# Altium PCB PDU_Main.PcbDoc
Units mm, origin at the board's own origin, x right, y up, seen from the top; angles counter-clockwise.
Board outline 180 x 140 mm, 2 copper layers (Top Layer, Bottom Layer); 69 components, 38 nets, 192 pads, 0 vias.
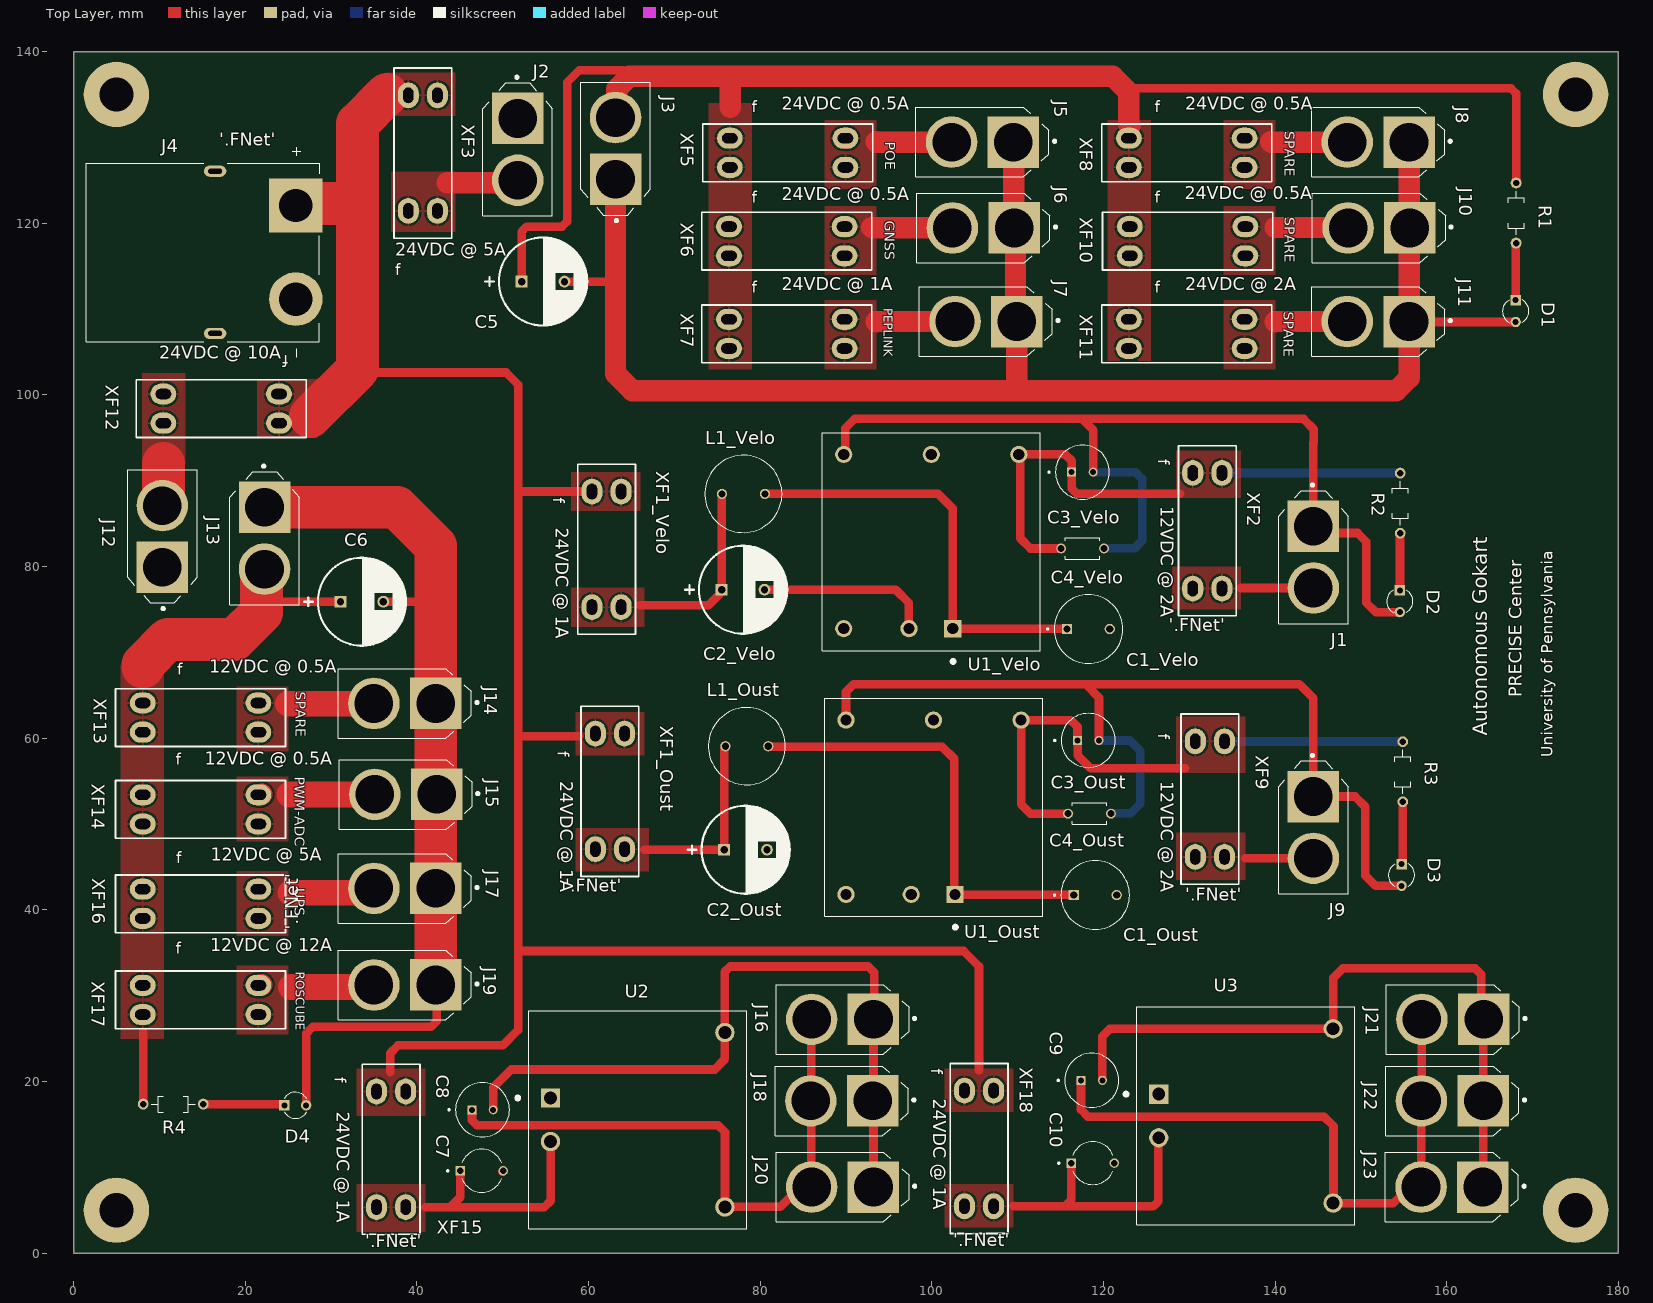
[diagram p0: Top Layer view]
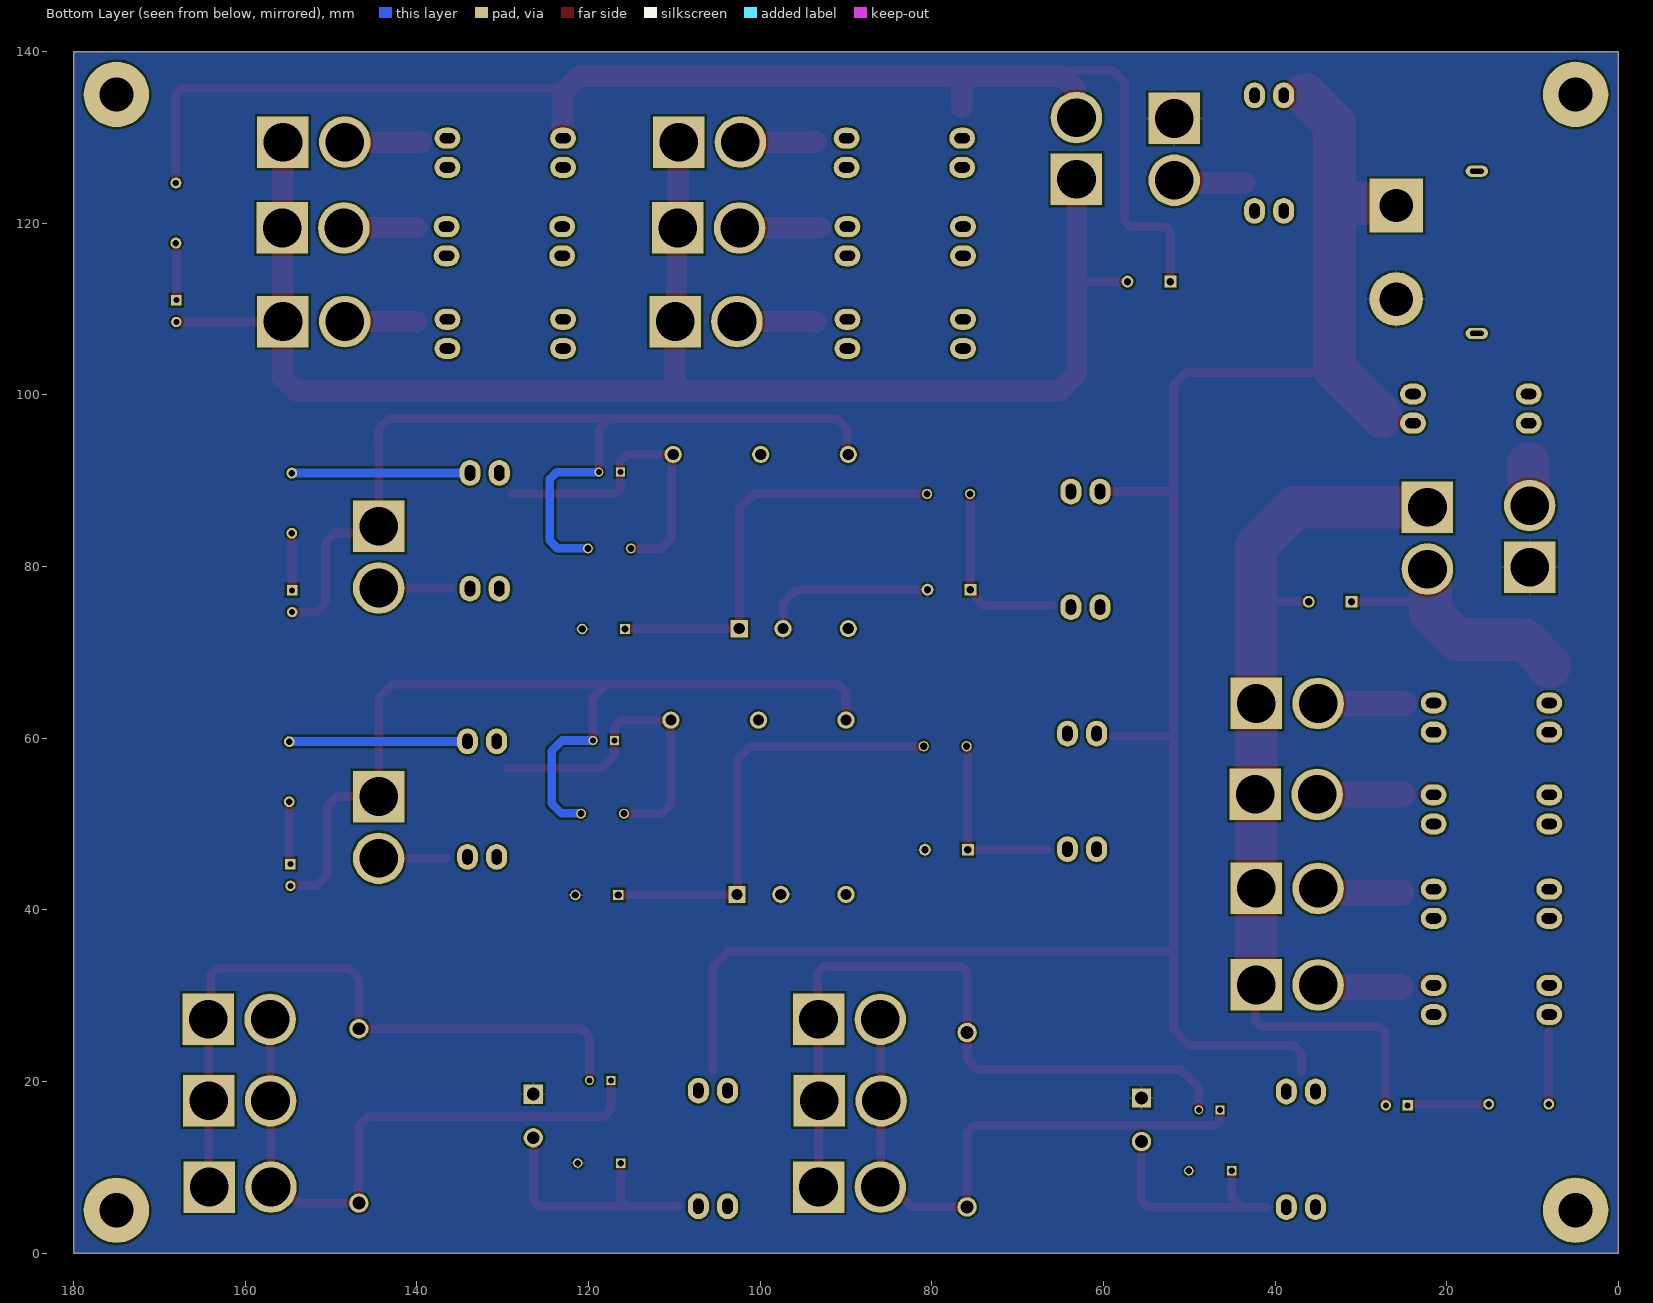
[diagram p1: Bottom Layer view, seen from below]

## Layer stack, top to bottom
Top Solder: solder mask 0.0102, Solder Resist, Dk 3.5
Top Layer: signal copper 0.0356
Dielectric 1: dielectric 0.32, FR-4, Dk 4.8
Bottom Layer: signal copper 0.0356
Bottom Solder: solder mask 0.0102, Solder Resist, Dk 3.5

## Board outline
0,0 0,140 180,140 180,0

## Design rules (kind name [scope] priority, off if disabled: settings)
AssemblyTestPointUsage [All] p1 off:
Clearance [All] p1: gap=0.254 ignorepadtopadclearanceinfootprint=FALSE except(0: Arc-Hole Track-Hole SMDPad-Hole THPad-Hole Via-Hole Fill-Hole Poly-Hole Region-Hole Text-Hole)
FabricationTestPointUsage [All] p1 off: valid=0 allowmultiple=FALSE
HoleSize [All] p1: absolutevalues=TRUE maxlimit=5 minlimit=0.025 maxpercent=80.000 minpercent=20.000
PolygonConnect [All] p1: connectstyle=Relief reliefconductorwidth=0.254 reliefentries=4 polygonreliefangle="90 Angle" airgapwidth=0.254
RoutingVias [All] p1: holewidth=0.711 width=1.27 viastyle="Through Hole" minholewidth=0.711 minwidth=1.27 maxholewidth=0.711 maxwidth=1.27
SilkToSolderMaskClearance [IsPad] p1: minsilkscreentomaskgap=0.051 clearancetoexposedcopper=TRUE
SolderMaskExpansion [All] p1: expansion=0.102 istentingtop=FALSE
Width [All] p1: maxlimit=5 minlimit=0.254 preferedwidth=1 minimp=50.000000 maximp=50.000000 favimp=50.000000
26 further rules are at their usual default settings.

## Classes and differential pairs
channel class "12V DCDC": "Ouster DCDC" Velodyne_DCDC
component class Velodyne_DCDC: C1_Velo C2_Velo C3_Velo C4_Velo L1_Velo U1_Velo XF1_Velo
component class PDU_Schematic: C5 C6 C7 C8 C9 C10 D1 D2 D3 D4 J1 J2 J3 J4 J5 J6 J7 J8 J9 J10 J11 J12 J13 J14 J15 J16 J17 J18 J19 J20 J21 J22 J23 R1 R2 R3 R4 U2 U3 XF2 XF3 XF5 XF6 XF7 XF8 XF9 XF10 XF11 XF12 XF13 XF14 XF15 XF16 XF17 XF18
component class "Ouster DCDC": C1_Oust C2_Oust C3_Oust C4_Oust L1_Oust U1_Oust XF1_Oust

## Components (designator, comment, footprint, x,y, rotation, side; value= is the part's Value field where it differs from the comment)
C1_Oust "ECE-A1HN330UB" Capacitor_33uF 118.8,41.8 r0 top (schematic designator C1)
C1_Velo "ECE-A1HN330UB" Capacitor_33uF 118,72.8 r0 top (schematic designator C1)
C2_Oust "ESC227M035AH1AA" NicCap_10x12.5 78.3,47 r0 top value=220uF (schematic designator C2)
C2_Velo "ESC227M035AH1AA" NicCap_10x12.5 78,77.3 r0 top value=220uF (schematic designator C2)
C3_Oust "Capacitor_10uF" Capacitor_10uF 118.2,59.8 r0 top (schematic designator C3)
C3_Velo "Capacitor_10uF" Capacitor_10uF 117.521,91.067 r0 top (schematic designator C3)
C4_Oust "Capacitor_1uF" Capacitor_1uF 118.3,51.3 r0 top (schematic designator C4)
C4_Velo "Capacitor_1uF" Capacitor_1uF 117.5,82.2 r0 top (schematic designator C4)
C5 "ESC227M035AH1AA" NicCap_10x12.5 54.7,113.2 r0 top value=220uF
C6 "ESC227M035AH1AA" NicCap_10x12.5 33.6,75.9 r0 top value=220uF
C7 "Capacitor_100uF" Capacitor_100uF 47.5,9.6 r0 top
C8 "Capacitor_10uF" Capacitor_10uF 47.621,16.767 r0 top
C9 "Capacitor_10uF" Capacitor_10uF 118.6,20.2 r0 top
C10 "Capacitor_100uF" Capacitor_100uF 118.7,10.5 r0 top
D1 "LED_Green_New" LED_Green_New 168,109.8 r270 top
D2 "LED_Green_New" LED_Green_New 154.5,76 r270 top
D3 "LED_Green_New" LED_Green_New 154.7,44.1 r270 top
D4 "LED_Green_New" LED_Green_New 25.8,17.2 r0 top
J1 "XT60 Connector" XT60_Connector 144.2,81.1 r270 top
J2 "XT60 Connector" XT60_Connector 51.5,128.6 r270 top
J3 "XT60 Connector" XT60_Connector 63.4,128.7 r90 top
J4 "XT90_Connector_Male" XT90_Connector_Male 16.5,117.5 r270 top
J5 "XT60 Connector" XT60_Connector 105.9,129.7 r180 top
J6 "XT60 Connector" XT60_Connector 106,119.7 r180 top
J7 "XT60 Connector" XT60_Connector 106.3,108.8 r180 top
J8 "XT60 Connector" XT60_Connector 152,129.7 r180 top
J9 "XT60 Connector" XT60_Connector 144.2,49.6 r270 top
J10 "XT60 Connector" XT60_Connector 152.1,119.7 r180 top
J11 "XT60 Connector" XT60_Connector 152,108.8 r180 top
J12 "XT60 Connector" XT60_Connector 10.6,83.5 r90 top
J13 "XT60 Connector" XT60_Connector 22,83.3 r270 top
J14 "XT60 Connector" XT60_Connector 38.6,64.3 r180 top
J15 "XT60 Connector" XT60_Connector 38.7,53.7 r180 top
J16 "XT60 Connector" XT60_Connector 89.6,27.5 r180 top
J17 "XT60 Connector" XT60_Connector 38.6,42.754 r180 top
J18 "XT60 Connector" XT60_Connector 89.5,18 r180 top
J19 "XT60 Connector" XT60_Connector 38.6,31.5 r180 top
J20 "XT60 Connector" XT60_Connector 89.6,7.954 r180 top
J21 "XT60 Connector" XT60_Connector 160.7,27.5 r180 top
J22 "XT60 Connector" XT60_Connector 160.65,18 r180 top
J23 "XT60 Connector" XT60_Connector 160.6,7.954 r180 top
L1_Oust "Inductor_1uH" Inductor_1uH 78.4,58.9 r0 top (schematic designator L1)
L1_Velo "Inductor_1uH" Inductor_1uH 78,88.3 r0 top (schematic designator L1)
R1 "Resistor_1k_TH" Resistor_1k_TH 168.1,121.2 r270 top
R2 "Resistor_1k_TH" Resistor_1k_TH 154.6,87.4 r270 top
R3 "Resistor_1k_TH" Resistor_1k_TH 154.9,56.1 r270 top
R4 "Resistor_1k_TH" Resistor_1k_TH 11.6,17.4 r0 top
U1_Oust "DC-DC_Converter_12V" DC-DC_Converter_12V 99.565,51.442 r180 top (schematic designator U1)
U1_Velo "DC-DC_Converter_12V" DC-DC_Converter_12V 99.3,82.4 r180 top (schematic designator U1)
U2 "DC-DC_Converter_5V" DC-DC_Converter_5V 65.9,15.3 r90 top
U3 "DC-DC_Converter_3.3V" DC-DC_Converter_3.3V 135.1,15.6 r90 top
XF1_Oust "3557-2" KSTN-3557-2 62.5,53.8 r270 top (schematic designator XF1)
XF1_Velo "3557-2" KSTN-3557-2 62.1,82 r270 top (schematic designator XF1)
XF2 "3557-2" KSTN-3557-2 132.1,84.165 r270 top
XF3 "3557-2" KSTN-3557-2 40.7,128.165 r270 top
XF5 "3557-2" KSTN-3557-2 83.2,128.2 r0 top
XF6 "3557-2" KSTN-3557-2 83.1,117.9 r0 top
XF7 "3557-2" KSTN-3557-2 83.1,107.1 r0 top
XF8 "3557-2" KSTN-3557-2 129.7,128.2 r0 top
XF9 "3557-2" KSTN-3557-2 132.4,52.9 r270 top
XF10 "3557-2" KSTN-3557-2 129.8,117.9 r0 top
XF11 "3557-2" KSTN-3557-2 129.7,107.1 r0 top
XF12 "3557-2" KSTN-3557-2 17.2,98.4 r180 top
XF13 "3557-2" KSTN-3557-2 14.8,62.4 r0 top
XF14 "3557-2" KSTN-3557-2 14.8,51.7 r0 top
XF15 "3557-2" KSTN-3557-2 37,12.1 r270 top
XF16 "3557-2" KSTN-3557-2 14.8,40.7 r0 top
XF17 "3557-2" KSTN-3557-2 14.8,29.5 r0 top
XF18 "3557-2" KSTN-3557-2 105.5,12.2 r270 top

## Footprints (in the part's own frame and the unit in brackets; to place one, negate y for a bottom-side part, rotate by r counter-clockwise, add the part's x,y. Pads: shape width x height; smd on the part's side, far side on the other; paste and mask are expansions set on the pad)
Capacitor_1uF [mm]
  round 1.15 hole 0.8: 1(-2.433,-0.097) 2(2.567,-0.097)
  silkscreen extent -1.93,-1.35 2.07,1.15
Capacitor_10uF [mm]
  round 1.05 hole 0.7: N(1.279,-0.067)
  rect 1.05x1.05 hole 0.7: P(-1.221,-0.067)
  silkscreen extent -3.97,-3.22 3.18,3.08, body extent -3.12,-3.22 3.18,3.08, height 5
Capacitor_33uF [mm]
  round 1.2 hole 0.85: N(2.741,-0.082)
  rect 1.2x1.2 / inner round 1.2 / far side rect 1.2x1.2 hole 0.85: P(-2.259,-0.082)
  silkscreen extent -4.61,-4.08 4.24,3.92, body extent -3.76,-4.08 4.24,3.92, height 11.5
Capacitor_100uF [mm]
  round 1.1 hole 0.75: N(2.56,-0.007)
  rect 1.1x1.1 hole 0.75: P(-2.44,-0.007)
  silkscreen extent -4,-2.51 2.38,2.49, body extent -2.69,-2.5 2.81,2.49, height 11
DC-DC_Converter_3.3V [mm]
  rect 2.25x2.25 hole 1.5: 1(2.926,8.66)
  round 2.25 hole 1.5: 2(-2.154,8.66) 3(-9.774,-11.66) 5(10.546,-11.66)
  silkscreen extent -12.31,-14.2 13.09,12.67
DC-DC_Converter_5V [mm]
  rect 2.25x2.25 hole 1.5: 1(2.783,10.334)
  round 2.25 hole 1.5: 2(-2.297,10.334) 3(-9.917,-9.986) 5(10.403,-9.986)
  silkscreen extent -12.46,-12.53 12.94,14.34
DC-DC_Converter_12V [mm]
  rect 2x2 hole 1.3: 1(-3.135,9.642)
  round 2 hole 1.3: 2(1.965,9.642) 3(-10.835,-10.658) 4(-0.635,-10.658) 5(9.565,-10.658) 6(9.565,9.642)
  silkscreen extent -13.34,-13.21 12.07,13.66
Inductor_1uH [mm]
  round 1.19 hole 0.84: 1(-2.453,0.161) 2(2.547,0.161)
  silkscreen extent -4.45,-4.34 4.55,4.66
KSTN-3557-2 [mm] "Fuse Holder, PCB Mount, Thru-Hole, Body 19.8x6.8mm, Height 7.4mm"
  oval 3x2.45 hole 1.2 slot 1.8 at 0 deg paste-1000: 1(-6.735,-1.7) 1(-6.735,1.7) 2(6.735,-1.7) 2(6.735,1.7)
  silkscreen extent -9.9,-3.36 9.9,3.36, body extent -9.88,-3.33 9.93,3.4, height 19.81
LED_Green_New [mm]
  rect 1.208x1.208 hole 0.7: A(-1.229,0.03)
  round 1.208 hole 0.7: C(1.311,0.03)
  silkscreen extent -1.25,-1.51 1.38,1.55
NicCap_10x12.5 [mil]
  rect 54x54 hole 34: 1(-98.42,0)
  round 54 hole 34: 2(98.43,0)
  silkscreen extent -266,-205 207,205, body extent -207,-207 207,207, height 532
Resistor_1k_TH [mm]
  round 1.258 hole 0.75: 1(-3.486,-0.03) 2(3.514,-0.03)
  silkscreen extent -2.54,-0.96 2.56,0.89
XT60_Connector [mm]
  rect 6x6 hole 4.5: 1(-3.6,0.254)
  round 6 hole 4.5: 2(3.6,0.254)
  silkscreen extent -8.55,-3.8 7.75,4.3
XT90_Connector_Male [mm]
  round 6.24 hole 3.9: N(6.339,9.4)
  rect 6.24x6.24 hole 3.9: P(-4.561,9.4)
  oval 1.3x2.6 hole 0.6 slot 1.6 at 90 deg: S1(-8.561,0) S2(10.339,0)
  silkscreen extent -11.36,-15 13.14,12.1, body extent -9.71,-15 11.49,12.1, height 10.3

## Part data
C1_Oust C1_Velo: library part Capacitor_33uF, "Cap Aluminum 33uF 50V 20% (8 X 11.5mm) Radial 5mm 110mA 2000 hr 85°C Ammo Pack", Capacitance=33uF, Case/Package=Radial, Manufacturer=Panasonic, Max Operating Temperature=85°C, Min Operating Temperature=-40°C, Package Quantity=1000, Ripple Current=110mA, Supplier Part Number 1=667-ECE-A1HN330UB, Tolerance=20%, Voltage Rating=50V, Category="Aluminum Electrolytic Capacitors", ComponentLink1Description=https://datasheet.ciiva.com/24043/aba0000ce97-24043933.pdf?src-supplier=Mouser, ComponentLink1URL=https://datasheet.ciiva.com/24043/aba0000ce97-24043933.pdf?src-supplier=Mouser, Construction=RADIAL, Diameter=8mm, Height=11.5mm, Height - Seated (Max)=0.492inch, Lead Diameter=0.6mm, Lead Pitch=5mm, Length=11.5mm, Life (Hours)=2000Hour, Manufacturer Part Number=ECE-A1HN330UB, Mount="Through Hole", Packaging="Ammo Pack", Pricing 1="1=0.89000, 10=0.62500, 50=0.47300, 100=0.41200, 500=0.30500, 1000=0.25900, 10000=0.25900 (USD)", Radiation Hardening=No, RoHS=Yes, Series=SU, Stock 1=2771, Supplier 1=Mouser, Termination=Radial, Voltage Rating (DC)=50V
C2_Oust C2_Velo C5 C6: library part CMP-3131333-1, "Aluminum Electrolytic Capacitor, Polarized, Aluminum (wet), 35V, 20% +Tol, 20% -Tol, 220uF, Through Hole Mount", Capacitor Type=Aluminium, Leakage Current=77uA, Manufacturer Series=ESC, Max Operating Temperature=105°C, Min Operating Temperature=-40°C, Package Shape=Cylindrical, Package Style=RadialMeter, Ripple Current=560mA, Tolerance=20%, Voltage=35V, Diameter=10mm, Dielectric Material=Aluminium, Length=12mm, Mount="Through Hole", Number of Pins=2, Packaging=Bulk, Polarity=Polarized, REACH SVHC=Yes, RoHS Compliant=Yes, Series=ESC, Tan Delta=0.1, Terminal Pitch=5mm, Termination=Wire
C3_Oust C3_Velo C8 C9: "Cap Aluminum 10uF 50V 20% (6.3 X 5mm) Radial 2.5mm 35mA 1000 hr 85°C Bulk", Capacitance=10uF, Case/Package=Radial, Leakage Current=3A, Manufacturer=Panasonic, Manufacturer Part Number=ECE-A1HKS100, Max Operating Temperature=85°C, Min Operating Temperature=-40°C, Package Quantity=200, Ripple Current=35mA, Tolerance=20%, Voltage=50V, Category="Aluminum Electrolytic Capacitors", ComponentLink1Description=https://datasheet.ciiva.com/11778/0900766b800274c4-11778985.pdf?src-supplier=RSComponents, ComponentLink1URL=https://datasheet.ciiva.com/11778/0900766b800274c4-11778985.pdf?src-supplier=RSComponents, ComponentLink2Description=https://datasheet.ciiva.com/2983/aba0000ce15-2983886.pdf?src-supplier=Avnet, ComponentLink2URL=https://datasheet.ciiva.com/2983/aba0000ce15-2983886.pdf?src-supplier=Avnet, ComponentLink3Description=https://datasheet.ciiva.com/43459/1339471-43459545.pdf?src-supplier=Farnell, ComponentLink3URL=https://datasheet.ciiva.com/43459/1339471-43459545.pdf?src-supplier=Farnell, ComponentLink4Description=https://datasheet.ciiva.com/24025/a-e-461514-24025641.pdf?src-supplier=Mouser, ComponentLink4URL=https://datasheet.ciiva.com/24025/a-e-461514-24025641.pdf?src-supplier=Mouser, ComponentLink5Description=https://datasheet.ciiva.com/16205/aba0000ce15-16205737.pdf?src-supplier=Future+Electronics, ComponentLink5URL=https://datasheet.ciiva.com/16205/aba0000ce15-16205737.pdf?src-supplier=Future+Electronics, ComponentLink6Description=https://datasheet.ciiva.com/46397/1339471-46397117.pdf?src-supplier=Element14, ComponentLink6URL=https://datasheet.ciiva.com/46397/1339471-46397117.pdf?src-supplier=Element14, ComponentLink7Description=https://datasheet.ciiva.com/15166/getdatasheetpartid-169217-15166123.pdf?src-supplier=Verical, ComponentLink7URL=https://datasheet.ciiva.com/15166/getdatasheetpartid-169217-15166123.pdf?src-supplier=Verical, ComponentLink8Description=https://datasheet.ciiva.com/14594/70067878-14594328.pdf?src-supplier=Allied+Electronics, ComponentLink8URL=https://datasheet.ciiva.com/14594/70067878-14594328.pdf?src-supplier=Allied+Electronics, Construction=RADIAL, Diameter=6.3mm, Height=5mm, Height - Seated (Max)=0.197inch, Lead Diameter=0.45mm, Lead Free="Lead Free", Lead Pitch=2.5mm, Length=5mm, Life (Hours)=1000Hour, Mount="Through Hole,PCB", Number of Pins=2, Packaging=Bulk, Polarity=Polar, Pricing 1="1=0.34520, 10=0.24180, 50=0.15970, 100=0.13540, 500=0.07970, 1000=0.07890, 2500=0.07540, 5000=0.07350 (USD)", Radiation Hardening=No, REACH SVHC="No SVHC", Ripple Current (AC)=35mA, RoHS=Yes, RoHS Compliant=Yes, Series=KS, Stock 1=3775, Supplier 1="Arrow Electronics", Supplier Part Number 1=ECE-A1HKS100, Termination=Radial, Voltage Rating=50V, Voltage Rating (DC)=50V, Weight=0.01lb, Width=0.5inch
C4_Oust C4_Velo: "Cap Ceramic 1uF 50V X5R 10% Radial 5mm 85C Ammo", Capacitance=1uF, Case/Package=Radial, Manufacturer=TDK, Manufacturer Part Number=FG28X5R1H105KRT06, Max Operating Temperature=85°C, Min Operating Temperature=-55°C, Tolerance=10%, Voltage Rating=50V, Category="Ceramic Capacitors", ComponentLink1Description=https://product.tdk.com/info/en/catalog/datasheets/leadmlcc_halogenfree_fg_en.pdf?src-supplier=Digi-Key, ComponentLink1URL=https://product.tdk.com/info/en/catalog/datasheets/leadmlcc_halogenfree_fg_en.pdf?src-supplier=Digi-Key, ComponentLink2Description=https://product.tdk.com/info/en/documents/chara_sheet/FG28X5R1H105KRT06.pdf?src-supplier=Digi-Key, ComponentLink2URL=https://product.tdk.com/info/en/documents/chara_sheet/FG28X5R1H105KRT06.pdf?src-supplier=Digi-Key, Height - Seated (Max)=0.217inch, Lead Pitch=0.197inch, Lead/Base Style=Kinked, Length=0.157inch, Mount="Through Hole", Packaging="Tape and Reel", Pricing 1="1=0.32620, 10=0.20190, 25=0.19940, 100=0.13080, 250=0.12850, 500=0.09320, 1000=0.09090, 3000=0.07620 (USD)", RoHS=Yes, RoHS Compliant=Yes, Stock 1=4381, Supplier 1="Arrow Electronics", Supplier Part Number 1=FG28X5R1H105KRT06, Width=0.098inch
C7 C10: "Cap Aluminum Lytic 100uF 16V 20% (5 X 11mm) Radial 5mm 180mA 2000h 85C Automotive Ammo", Capacitance=100uF, Case/Package=Radial, Leakage Current=3mA, Manufacturer=Panasonic, Manufacturer Part Number=ECA-1CM101B, Max Operating Temperature=85°C, Min Operating Temperature=-40°C, Package Quantity=2000, Ripple Current=180mA, Tolerance=20%, Voltage=16V, Category="Aluminum Electrolytic Capacitors", ComponentLink1Description=https://datasheet.ciiva.com/7803/aba0000ce12-7803672.pdf?src-supplier=Element14, ComponentLink1URL=https://datasheet.ciiva.com/7803/aba0000ce12-7803672.pdf?src-supplier=Element14, ComponentLink2Description=https://datasheet.ciiva.com/14608/70067785-14608475.pdf?src-supplier=Allied+Electronics, ComponentLink2URL=https://datasheet.ciiva.com/14608/70067785-14608475.pdf?src-supplier=Allied+Electronics, Construction=RADIAL, Diameter=5mm, Dissipation Factor=0.2%, Height=11mm, Height - Seated (Max)=0.472inch, Lead Diameter=0.5mm, Lead Free="Lead Free", Lead Pitch=5mm, Lead/Base Style=Straight, Length=11mm, Life (Hours)=2000Hour, Mount="Through Hole,PCB", Packaging="Ammo Pack", Pricing 1="1=0.28870, 10=0.18780, 25=0.18590, 100=0.09900, 250=0.09800, 500=0.05120, 1000=0.04920, 3000=0.04870 (USD)", Radiation Hardening=No, REACH SVHC=Unknown, RoHS=Yes, RoHS Compliant=Yes, Series=M, Stock 1=3761, Supplier 1="Arrow Electronics", Supplier Part Number 1=ECA-1CM101B, Termination=Radial, Voltage Rating=16V, Voltage Rating (DC)=16V, Width=0inch
D1 D2 D3 D4: "White high-intensity LED lamp, Color White, Vf 3.2 V, Radial-2, RoHS", Case/Package=Radial, Color=White, Forward Current=20mA, Forward Voltage=3.2V, Lens Color=Colorless, Manufacturer="TT Optek", Manufacturer Part Number=OVLAW4CB7, Max Operating Temperature=100°C, Min Operating Temperature=-40°C, Package Quantity=500, Category=LEDs, ComponentLink1Description=https://datasheet.ciiva.com/2113/ovlaw4cb7-2113528.pdf?src-supplier=Digi-Key, ComponentLink1URL=https://datasheet.ciiva.com/2113/ovlaw4cb7-2113528.pdf?src-supplier=Digi-Key, ComponentLink2Description=https://datasheet.ciiva.com/13500/ovlaw4cb7-20369-13500840.pdf?src-supplier=Mouser, ComponentLink2URL=https://datasheet.ciiva.com/13500/ovlaw4cb7-20369-13500840.pdf?src-supplier=Mouser, Height=5.2mm, Illumination Color=White, Lead Free="Lead Free", Lead Length=26.6mm, Lens Style=Dome,Clear,Round, Lens Transparency=Clear, Luminous Intensity=6200mcd, Mount="Through Hole", Number of Pins=1, Packaging=Bulk, Pricing 1="1=0.42860 (USD)", REACH SVHC="No SVHC", RoHS=Yes, RoHS Compliant=Yes, Series=-, Stock 1=9, Supplier 1="Arrow Electronics", Supplier Part Number 1=OVLAW4CB7, Test Current=20mA, Viewing Angle=45°
J1 J2 J3 J5 J6 J7 J8 J9 J10 J11 J12 J13 J14 J15 J16 J17 J18 J19 J20 J21 J22 J23: "DC power connectors AMASS - XT60"
J4: "DC power connectors AMASS - XT90"
L1_Oust L1_Velo: "Inductor Power Drum Core 1uH 20% 7.96MHz 20Q-Factor Ferrite 3.5A 0.013Ohm DCR RDL Automotive Box", Case/Package=Radial, Current Rating=3.5A, DC Resistance (DCR)=13mR, Inductance=1uH, Manufacturer=Abracon, Manufacturer Part Number=AIUR-03-1R0M, Max Operating Temperature=85°C, Min Operating Temperature=-40°C, Package Quantity=1000, Resistor Type=Wirewound, Saturation Current=10A, Self Resonant Frequency=150MHz, Supplier Part Number 1=AIUR-03-1R0M-ND, Test Frequency=7.96MHz, Tolerance=20%, Category="Fixed Inductors", ComponentLink1Description=https://datasheet.ciiva.com/6705/aiur-03-6705766.pdf?src-supplier=Digi-Key, ComponentLink1URL=https://datasheet.ciiva.com/6705/aiur-03-6705766.pdf?src-supplier=Digi-Key, Core Material=Ferrite, Height=0.472inch, Height - Seated (Max)=0.472inch, Mount="Through Hole", Packaging=Bulk, Pricing 1="1=0.55000, 10=0.47800, 25=0.44360, 50=0.37540, 100=0.34120, 250=0.32076, 500=0.28664, 1000=0.23205, 2500=0.21840 (USD)", RoHS=Yes, RoHS Compliant=Yes, Series=AIUR-03, Shielding=Unshielded, Stock 1=764, Supplier 1=Digi-Key
R1 R2 R3 R4: "Carbon Film Resistors - Through Hole 1K Ohm 5% 1/4W Res Carbon Film", Case/Package=Conformal, Manufacturer="TE Connectivity", Manufacturer Part Number=2-1623927-3, Max Operating Temperature=155°C, Max Power Dissipation=250mW, Min Operating Temperature=-55°C, Package Quantity=1, Resistance=1kR, Resistor Type="Carbon Film", Supplier Part Number 1=CFR16J1K0, Temperature Coefficient=-450ppm/°C, Tolerance=5%, Category="Through-Hole Resistors", ComponentLink1Description=https://datasheet.ciiva.com/5477/ng-ds-1773195-c-207356-5477538.pdf?src-supplier=Mouser, ComponentLink1URL=https://datasheet.ciiva.com/5477/ng-ds-1773195-c-207356-5477538.pdf?src-supplier=Mouser, ComponentLink2Description=https://datasheet.ciiva.com/6533/eng-cd-1623927-ba-6533055.pdf?src-supplier=Digi-Key, ComponentLink2URL=https://datasheet.ciiva.com/6533/eng-cd-1623927-ba-6533055.pdf?src-supplier=Digi-Key, ComponentLink3Description=https://datasheet.ciiva.com/30240/eng-ds-1773195-e-30240795.pdf?src-supplier=Onlinecomponents.com, ComponentLink3URL=https://datasheet.ciiva.com/30240/eng-ds-1773195-e-30240795.pdf?src-supplier=Onlinecomponents.com, Construction=Cylindrical, Diameter=1.85mm, Length=3.5mm, Military Standard=Not, Mount="Through Hole", Number of Terminations=2, Packaging="Cut Tape", Power Rating=250mW, Pricing 1="1=0.06670, 10=0.05530, 25=0.03960, 50=0.03920, 100=0.02970, 250=0.02310, 500=0.01850, 1000=0.01310, 3000=0.01300 (USD)", Radiation Hardening=No, RoHS=Yes, RoHS Compliant=Yes, Series="CFR16, Neohm", Stock 1=3327, Supplier 1="Arrow Electronics", Termination=Axial
U1_Oust U1_Velo: "Isolated Module DC DC Converter 1 Output 12V - - 2.5A 9V - 36V Input"
U2: "5 Vdc, 2 A, 10 W, 8 to 36 Vdc Input Range", Manufacturer=CUI, Manufacturer Part Number=P7805-2000R-S, Supplier Part Number 1=102-P7805-2000R-S-ND, ComponentLink1Description=https://datasheet.octopart.com/P7805-2000R-S-CUI-datasheet-165372030.pdf?src-supplier=CUI, ComponentLink1URL=https://datasheet.octopart.com/P7805-2000R-S-CUI-datasheet-165372030.pdf?src-supplier=CUI, ComponentLink2Description=https://datasheet.octopart.com/P7805-2000R-S-CUI-datasheet-165270846.pdf?src-supplier=Electro+Sonic, ComponentLink2URL=https://datasheet.octopart.com/P7805-2000R-S-CUI-datasheet-165270846.pdf?src-supplier=Electro+Sonic, Pricing 1="1=5.96000, 5=5.87200, 10=5.78600, 25=5.61600, 44=5.44591, 88=5.27568, 264=5.10557, 440=4.76518 (USD)", Stock 1=17, Supplier 1=DigiKey
U3: "3.3 Vdc, 2 A, 6.6 W, 6 to 36 Vdc Input Range", Manufacturer=CUI, Manufacturer Part Number=P7803-2000R-S, Supplier Part Number 1=102-P7803-2000R-S-ND, ComponentLink1Description=https://datasheet.octopart.com/P7803-2000R-S-CUI-datasheet-165372030.pdf?src-supplier=CUI, ComponentLink1URL=https://datasheet.octopart.com/P7803-2000R-S-CUI-datasheet-165372030.pdf?src-supplier=CUI, ComponentLink2Description=https://datasheet.octopart.com/P7803-2000R-S-CUI-datasheet-165270846.pdf?src-supplier=Electro+Sonic, ComponentLink2URL=https://datasheet.octopart.com/P7803-2000R-S-CUI-datasheet-165270846.pdf?src-supplier=Electro+Sonic, Pricing 1="1=5.96000, 5=5.87200, 10=5.78600, 25=5.61600, 44=5.44591, 88=5.27568, 264=5.10557, 440=4.76518 (USD)", Stock 1=88, Supplier 1=Digi-Key
XF1_Oust XF1_Velo XF5: library part CMP-000024-2, "Fuse Holder; Auto; 2 in1 Blade; THM; 1 Fuse; Vertical; 30 Amps; ATO/ATC", FuseCurrent=1A, FuseVoltage=32VDC
  XF1_Oust XF1_Velo: FNet=LIDAR_DCDC
  XF5: FNet=PEPLINK
XF2 XF9: library part CMP-000024-2, "Fuse Holder; Auto; 2 in1 Blade; THM; 1 Fuse; Vertical; 30 Amps; ATO/ATC", FuseCurrent=2A, FuseVoltage=32VDC
  XF2: FNet=VELODYNE
  XF9: FNet=OUSTER
XF3: library part CMP-000024-2, "Fuse Holder; Auto; 2 in1 Blade; THM; 1 Fuse; Vertical; 30 Amps; ATO/ATC", FuseCurrent=5A, FuseVoltage=32VDC, FNet=24VDC
XF6 XF12: library part CMP-000024-2, "Fuse Holder; Auto; 2 in1 Blade; THM; 1 Fuse; Vertical; 30 Amps; ATO/ATC", FuseCurrent=3A, FuseVoltage=32VDC
  XF6: FNet=JETSON
  XF12: FNet=12VDC
XF7 XF10 XF17: library part CMP-000024-2, "Fuse Holder; Auto; 2 in1 Blade; THM; 1 Fuse; Vertical; 30 Amps; ATO/ATC", FuseCurrent=XX, FuseVoltage=32VDC, FNet=SPARE
XF8 XF11 XF13 XF14: library part CMP-000024-2, "Fuse Holder; Auto; 2 in1 Blade; THM; 1 Fuse; Vertical; 30 Amps; ATO/ATC", FuseCurrent=0.5A, FuseVoltage=32VDC
  XF8: FNet=GNSS
  XF11: FNet=POE
  XF13: FNet=PCM
  XF14: FNet=CAMERA
XF15 XF16 XF18: library part CMP-000024-2, "Fuse Holder; Auto; 2 in1 Blade; THM; 1 Fuse; Vertical; 30 Amps; ATO/ATC"

## Free pads (board coordinates)
  round 7.62 hole 4: 1(5,135) 2(175,135) 3(5,5) 4(175,5)

## Nets (pads, with @x,y where several pads share a name; then routed paths per layer and width w, separated by ;. In a path a pad name is that pad's centre, name@x,y a point inside that pad or via, vN(x,y) a via of type N, cw(c..) or ccw(c..) an arc to the next point about the centre after c; other vN are vias at no path point)
-VOUT_3.3V: C9.N J21.1 J22.1 J23.1 U3.5 | length 81.9
  Top Layer w1: C9.N 119.879,25.279 120.746,26.146 U3.5 146.76,32.06 147.9,33.2 163.3,33.2 164,32.5 164,27.546 J21.1 164.25,27.196 J21.1@164.25,27.15 ; J21.1@164,27.4 J21.1@164.25,27.15 ; J23.1@164.1,6.246 164.2,6.146 J23.1@164.25,6.196 ; J23.1 164.25,7.75 J22.1@164.25,16.55 ; J22.1@164.3,16.6 J22.1@164.25,16.55 ; J22.1@164.25,16.55 J22.1 J21.1@164.25,27.15
-VOUT_5V: C8.N J16.1 J18.1 J20.1 U2.5 | length 84.4
  Top Layer w1: C8.N 48.9,19.3 51,21.4 74.7,21.4 75.886,22.586 U2.5 75.886,32.786 76.5,33.4 92.6,33.4 93.3,32.7 93.3,27.346 J16.1 93.2,17.846 J18.1 93.2,17.646 J20.1
  Bottom Layer w0.254: J20.1 J20.1@93.346,7.554
-VOUT_Ouster: C3_Oust.N C4_Oust.2 D3.C J9.1 U1_Oust.5 | length 112.2
  Top Layer w1: U1_Oust.5@90.014,62.114 U1_Oust.5 90,65.4 90.9,66.3 117.9,66.3 ; C3_Oust.N 119.479,64.721 117.9,66.3 ; D3.C@154.7,42.76 D3.C 151.711,42.789 150.5,44 150.5,52 149.3,53.2 J9.1 144.454,64.646 142.8,66.3 117.9,66.3
  Bottom Layer w1: C3_Oust.N 123.067,59.733 124.3,58.5 124.3,52.4 123.132,51.232 120.896,51.232 C4_Oust.2
-VOUT_Velodyne: C3_Velo.N C4_Velo.2 D2.C J1.1 U1_Velo.5 | length 113.1
  Top Layer w1: U1_Velo.5 89.926,93.249 89.926,96.126 91,97.2 117.5,97.2 ; C3_Velo.N 118.8,95.9 117.5,97.2 ; D2.C 151.711,74.689 150.6,75.8 150.6,82.9 149.6,83.9 145.254,83.9 J1.1 144.454,94.446 144.5,94.492 144.5,96 143.3,97.2 117.5,97.2
  Bottom Layer w1: C3_Velo.N 123.7,91 124.5,90.2 124.5,83 123.632,82.132 120.096,82.132 C4_Velo.2
"NetC1_Ouster DCDC_P": C1_Oust.P L1_Oust.2 U1_Oust.1 | length 51.9
  Top Layer w1: L1_Oust.2@81.035,59.025 81.118,59.025 81.143,59 101.2,59 102.6,57.6 102.6,41.9 U1_Oust.1 102.741,41.759 116.5,41.759 C1_Oust.P
NetC1_Velodyne_DCDC_P: C1_Velo.P L1_Velo.2 U1_Velo.1 | length 49.9
  Top Layer w1: L1_Velo.2 100.739,88.461 102.435,86.765 U1_Velo.1 102.455,72.738 115.721,72.738 C1_Velo.P
"NetC2_Ouster DCDC_1": C2_Oust.1 L1_Oust.1 XF1_Oust.2 | length 21.5
  Top Layer w1: XF1_Oust.2@64.2,47.065 XF1_Oust.2@64.232,47.033 ; 66.5,47 C2_Oust.1 75.8,58.863 75.947,59.01 L1_Oust.1
NetC2_Velodyne_DCDC_1: C2_Velo.1 L1_Velo.1 XF1_Velo.2 | length 21.5
  Top Layer w1: 66,75.5 74,75.5 75.314,76.814 75.314,77.114 C2_Velo.1 L1_Velo.1@75.5,88.414
NetC7_P: C7.P U2.2 XF15.2 | length 26.7
  Top Layer w1: 40.999,5.365 43.9,5.365 ; C7.P 45.06,6.525 43.9,5.365 ; U2.2@55.478,12.916 U2.2 55.6,12.969 55.6,6.1 54.865,5.365 43.9,5.365
NetC10_P: C10.P U3.2 XF18.2 | length 29.9
  Top Layer w1: 109.5,5.5 109.535,5.465 115.5,5.465 ; C10.P 116.26,6.225 115.5,5.465 ; U3.2 126.4,13.407 126.4,6.051 125.814,5.465 115.5,5.465
NetD1_A: D1.A R1.2 | length 6.7
  Top Layer w1: D1.A 168.05,111.05 168.05,117.666 R1.2
NetD2_A: D2.A R2.2 | length 6.7
  Top Layer w1: D2.A 154.55,77.25 154.55,83.866 R2.2
NetD3_A: D3.A R3.2 | length 7.3
  Top Layer w1: D3.A 154.87,45.47 R3.2
NetD4_A: D4.A R4.2 | length 9.5
  Top Layer w1: R4.2@15.134,17.35 R4.2 24.43,17.37 D4.A
NetJ1_2: J1.2 XF2.2 | length 8.5
  Top Layer w1: XF2.2@133.8,77.43 XF2.2@133.835,77.465 ; 136,77.5 J1.2
NetJ2_2: J2.2 XF3.2 | length 8.3
  Top Layer w2.5: 43.56,124.7 51.454,124.7 J2.2
NetJ5_2: J5.2 XF5.2 | length 9
  Top Layer w2.5: XF5.2@89.935,129.9 XF5.2@90.16,129.9 ; 93.5,129.5 93.554,129.446 J5.2
NetJ6_2: J6.2 XF6.2 | length 9.6
  Top Layer w2.5: XF6.2@89.835,119.6 XF6.2@89.86,119.575 ; 93,119.5 93.054,119.446 J6.2 J6.2@102.271,119.575
NetJ7_2: J7.2 XF7.2 | length 9.6
  Top Layer w2.5: XF7.2@89.835,108.8 XF7.2@89.86,108.775 ; 93.5,108.5 93.546,108.546 J7.2 J7.2@102.471,108.775
NetJ8_2: J8.2 XF8.2 | length 9.6
  Top Layer w2.5: XF8.2@136.435,129.9 XF8.2@136.46,129.875 ; 139.5,129.5 139.554,129.446 J8.2 J8.2@147.971,129.875
NetJ9_2: J9.2 XF9.2 | length 8.1
  Top Layer w1: XF9.2@134.1,46.165 XF9.2@134.182,46.083 ; 136.5,46 J9.2
NetJ10_2: J10.2 XF10.2 | length 11.1
  Top Layer w0.254: XF10.2@136.435,120.1 XF10.2@136.855,119.68 ; J10.2@147.7,119.446 J10.2@148.5,118.646
  Top Layer w2.5: XF10.2@136.535,119.6 XF10.2@136.56,119.575 ; 140,119.5 148.446,119.5 J10.2 J10.2@147.7,119.446
NetJ11_2: J11.2 XF11.2 | length 10.2
  Top Layer w0.254: J11.2@147.527,107.946 J11.2@149,107.946
  Top Layer w2.5: XF11.2@136.435,108.8 XF11.2@136.66,108.8 ; 140,108.5 140.046,108.546 J11.2 J11.2@148.354,108.5
NetJ12_2: J12.2 XF12.2 | length 5
  Top Layer w5: J12.2 10.5,87.254 10.5,92
NetJ14_2: J14.2 XF13.2 | length 10.1
  Top Layer w2.5: XF13.2@21.435,64.1 XF13.2@21.46,64.075 ; J14.2@34.971,64.075 J14.2
  Top Layer w3: 25,64 34.954,64 J14.2
NetJ15_2: J15.2 XF14.2 | length 10.3
  Top Layer w2.5: XF14.2@21.635,53.4 21.86,53.4 XF14.2@21.906,53.446
  Top Layer w3: 25.124,53.446 J15.2
NetJ17_2: J17.2 XF16.2 | length 10
  Top Layer w2.5: XF16.2@21.57,42.4 XF16.2@21.595,42.425
  Top Layer w3: 25.277,42 34.5,42 J17.2
NetJ19_2: J19.2 XF17.2 | length 11.4
  Top Layer w0.254: J19.2@34.066,32.18 J19.2
  Top Layer w2.5: XF17.2@21.635,31.2 21.86,31.2 XF17.2@21.906,31.246
  Top Layer w3: 25.351,31 34.754,31 J19.2
VOUT_3.3V: C9.P J21.2 J22.2 J23.2 U3.3 | length 73.7
  Top Layer w1: C9.P 117.379,16.721 118.2,15.9 145.7,15.9 146.8,14.8 U3.3@146.8,5.867 ; U3.3@146.919,5.986 U3.3@146.8,5.867 ; J23.2@156.84,5.986 J23.2@157.025,6.171 ; J22.2@157.075,16.575 J22.2@157.025,16.525 ; J21.2 157.075,27.221 157.075,17.771 J22.2 157.025,17.721 J22.2@157.025,16.525 ; U3.3@146.8,5.867 U3.3 153.773,5.826 155.647,7.7 J23.2 157.025,7.725 J22.2@157.025,16.525
VOUT_5V: C8.P J16.2 J18.2 J20.2 U2.3 | length 70.8
  Top Layer w0.254: J16.2 J16.2@86.05,27.196
  Top Layer w1: C8.P 46.425,16.675 46.425,15.486 47.011,14.9 75.1,14.9 75.9,14.1 75.9,5.397 U2.3 82.33,5.383 84.647,7.7 J20.2 85.95,7.75 85.95,17.696 J18.2 85.95,17.796 85.95,27.196 J16.2
VOUT_Ouster: C3_Oust.P C4_Oust.1 R3.1 U1_Oust.3 XF9.1 | length 60.3
  Top Layer w1: C4_Oust.1 111.497,51.203 110.4,52.3 U1_Oust.3 116.2,62.1 116.975,61.325 116.975,59.737 C3_Oust.P 116.979,58.021 118.5,56.5 129.5,56.5 ; XF9.1@130.423,59.358 XF9.1@130.7,59.635
  Bottom Layer w1: XF9.1@134.1,59.635 134.125,59.61 154.845,59.61 R3.1
VOUT_Velodyne: C3_Velo.P C4_Velo.1 R2.1 U1_Velo.3 XF2.1 | length 59.1
  Top Layer w0.254: C4_Velo.1@114.8,81.936 C4_Velo.1@114.967,82.103
  Top Layer w1: C4_Velo.1 111.497,82.103 110.3,83.3 110.3,92.893 U1_Velo.3 115.556,93.058 116.3,92.314 116.3,89.086 116.886,88.5 128.946,88.5 ; XF2.1@130.123,90.623 XF2.1@130.4,90.9
  Bottom Layer w1: XF2.1@133.8,90.9 133.807,90.893 154.563,90.893 R2.1
XT60_Neg: C5.2 D1.C J3.1 J5.1 J6.1 J7.1 J8.1 J10.1 J11.1 | length 191.8
  Top Layer w1: C5.2 63.146,113.2 ; J11.1 155.657,108.489 D1.C
  Top Layer w2.5: J3.1 63.146,113.2 63.146,102.45 65.096,100.5 109.5,100.5 ; J5.1 109.55,129.396 109.55,119.496 J6.1 109.75,119.296 109.75,108.696 J7.1 109.9,100.9 109.5,100.5 ; J8.1 155.65,129.396 155.65,119.496 J10.1 155.65,119.396 155.65,108.596 J11.1 155.6,101.964 154.136,100.5 109.5,100.5
XT60_Neg_2: C6.2 D4.C J13.1 J14.1 J15.1 J17.1 J19.1 | length 107.5
  Top Layer w1: D4.C 27.111,25.611 27.9,26.4 41.7,26.4 42.3,27 42.3,31.146 J19.1 ; C6.2 42.1,75.9 42.2,75.8
  Top Layer w5: J13.1 37.671,86.9 42.2,82.371 42.2,75.8 J14.1 J17.1 J19.1
XT60_Pos: C5.1 J3.2 R1.1 XF5.1 XF6.1 XF7.1 XF8.1 XF10.1 XF11.1 | length 168.6
  Top Layer w0.254: XF11.1@122.9,109.6 XF11.1@122.932,109.632
  Top Layer w1: C5.1 52.2,119.014 52.786,119.6 56.914,119.6 57.5,120.186 57.5,136.4 58.9,137.8 64.064,137.8 64.764,137.1 ; 117.7,137.1 118.1,137.5 121.1,137.5 ; 122.5,135.7 167.484,135.7 168.07,135.114 R1.1
  Top Layer w2.5: J3.2@62.646,131.8 J3.2 63.3,132.454 63.3,135.636 64.764,137.1 76.5,137.1 ; XF6.1@76.365,119.6 76.44,119.6 XF6.1@76.465,119.625 ; 76.5,133.5 76.5,137.1 ; 123.092,131.386 122.965,131.513 122.965,135.235 121.1,137.1 117.7,137.1 76.5,137.1
XT60_Pos_2: C6.1 J13.2 R4.1 XF13.1 XF14.1 XF16.1 XF17.1 | length 41.1
  Top Layer w0.254: XF13.1@7.965,60.7 XF13.1@8.065,60.6 ; XF14.1@8.065,53.5 XF14.1@8.165,53.4 ; XF16.1@8.1,39 XF16.1@8.133,38.967 ; XF16.1@8.1,42.4 XF16.1@8.133,42.433 ; XF17.1@8.133,31.232 XF17.1@8.165,31.2 ; XF14.1@8.133,49.967 XF14.1@8.165,50 ; J13.2@22.054,79.2 J13.2@22.563,79.2
  Top Layer w1: 8.1,25.8 8.114,25.786 R4.1 ; 21.9,74.629 23.171,75.9 C6.1 ; J13.2 J13.2@22.354,79.6
  Top Layer w5: 8.1,68.3 8.1,68.6 11,71.5 18.771,71.5 21.9,74.629 21.9,79.075 22.254,79.429 J13.2
XT90_Neg: C1_Oust.N C1_Velo.N C2_Oust.2 C2_Velo.2 C7.N C10.N J2.1 J4.N J12.1 U1_Oust.2 U1_Velo.2 U2.1 U3.1 | length 20.8
  Top Layer w1: C7.N@49.983,9.49 50.06,9.566 C7.N ; C2_Velo.2 95.8,77.3 97.335,75.765 U1_Velo.2 U1_Velo.2@97.4,72.693 ; C1_Velo.N@120.703,72.68 C1_Velo.N
XT90_Pos: J4.P XF1_Oust.1 XF1_Velo.1 XF3.1 XF12.1 XF15.1 XF18.1 | length 243.6
  Top Layer w1: 32.7,102.6 50.4,102.6 51.8,101.2 51.8,88.6 ; 36.9,21.1 36.9,23.3 37.8,24.2 50,24.2 51.8,26 51.8,35.4 ; 58.9,60.2 51.8,60.2 ; XF1_Velo.1@60.4,88.735 51.935,88.735 51.8,88.6 ; 105.5,21.323 105.5,33.4 103.7,35.2 52,35.2 51.8,35.4 ; 51.8,35.4 51.8,60.2 ; 51.8,60.2 51.8,88.6
  Top Layer w5: J4.P@26.139,122.3 33.1,122.3 ; 27.583,97.483 33.1,103 33.1,122.3 ; 36.5,135 33.1,131.6 33.1,122.3
pads on no net: J4.S1 J4.S2 U1_Oust.4 U1_Oust.6 U1_Velo.4 U1_Velo.6

## Polygon pours and split planes (outlines as drawn)
XT90_Neg on Bottom Layer "XT90_NEG_L02_P000" (solid, pour order 0): 0,140 180,140 180,0 0,0
XT90_Pos on Top Layer "XT90_POS_L01_P027" (solid, pour order 27): 21.4,101.8 28.4,101.8 28.4,95 21.4,95
XT90_Pos on Top Layer "XT90_POS_L01_P032" (solid, pour order 32): 33,21.5 41,21.5 41,16 33,16
XT90_Pos on Top Layer "XT90_POS_L01_P021" (solid, pour order 21): 66,91 66,86.5 58,86.5 58,91
XT90_Pos on Top Layer "XT90_POS_L01_P026" (solid, pour order 26): 36.5,137.5 44.5,137.5 44.5,132.5 36.5,132.5
VOUT_Ouster on Top Layer "VOUT_OUSTER_L01_P038" (solid, pour order 38): 128.5,62.5 136.5,62.5 136.5,56 128.5,56
VOUT_Velodyne on Top Layer "VOUT_VELODYNE_L01_P036" (solid, pour order 36): 128.5,93.5 136,93.5 136,88 128.5,88
NetJ1_2 on Top Layer "NETJ1_2_L01_P035" (solid, pour order 35): 136,80 136,75 128,75 128,80 130.5,80
NetJ9_2 on Top Layer "NETJ9_2_L01_P034" (solid, pour order 34): 128.5,49 136.5,49 136.5,43.5 128.5,43.5
NetC7_P on Top Layer "NETC7_P_L01_P033" (solid, pour order 33): 33,8 41,8 41,2.5 33,2.5
NetC10_P on Top Layer "NETC10_P_L01_P030" (solid, pour order 30): 101.5,8 109.5,8 109.5,3 101.5,3
XT90_Pos on Top Layer "XT90_POS_L01_P029" (solid, pour order 29): 109.5,21.5 109.5,16.5 101.5,16.5 101.5,21.5
NetJ12_2 on Top Layer "NETJ12_2_L01_P028" (solid, pour order 28): 8,102.5 13,102.5 13,92 8,92
NetJ2_2 on Top Layer "NETJ2_2_L01_P025" (solid, pour order 25): 37,126 44.5,126 44.5,119 37,119
"NetC2_Ouster DCDC_1" on Top Layer "NETC2_OUSTER_DCDC_1_L01_P024" (solid, pour order 24): 58.5,49.5 67,49.5 67,44.5 58.5,44.5
XT90_Pos on Top Layer "XT90_POS_L01_P023" (solid, pour order 23): 58.5,63 66.5,63 66.5,58 58.5,58
NetC2_Velodyne_DCDC_1 on Top Layer "NETC2_VELODYNE_DCDC_1_L01_P022" (solid, pour order 22): 66.5,73 58,73 58,77.5 66.5,77.5
NetJ19_2 on Top Layer "NETJ19_2_L01_P020" (solid, pour order 20): 19,33.5 25,33.5 25,25.5 19,25.5
NetJ17_2 on Top Layer "NETJ17_2_L01_P019" (solid, pour order 19): 19,44.5 25,44.5 25,37 19,37
NetJ15_2 on Top Layer "NETJ15_2_L01_P018" (solid, pour order 18): 19,55.5 25,55.5 25,48 19,48
NetJ14_2 on Top Layer "NETJ14_2_L01_P017" (solid, pour order 17): 19,66 25,66 25,58.5 19,58.5
XT60_Pos_2 on Top Layer "XT60_POS_2_L01_P016" (solid, pour order 16): 5.5,68.5 10.5,68.5 10.5,25 5.5,25
NetJ5_2 on Top Layer "NETJ5_2_L01_P007" (solid, pour order 7): 87.5,132 93.5,132 93.5,124 87.5,124
NetJ11_2 on Top Layer "NETJ11_2_L01_P012" (solid, pour order 12): 134,111 140,111 140,103 134,103
NetJ10_2 on Top Layer "NETJ10_2_L01_P011" (solid, pour order 11): 134,122 140,122 140,114 134,114
NetJ8_2 on Top Layer "NETJ8_2_L01_P010" (solid, pour order 10): 134,132 140,132 140,124 134,124
NetJ7_2 on Top Layer "NETJ7_2_L01_P009" (solid, pour order 9): 87.5,111 93.5,111 93.5,103 87.5,103
NetJ6_2 on Top Layer "NETJ6_2_L01_P008" (solid, pour order 8): 87.5,122 93.5,122 93.5,114 87.5,114
XT60_Pos on Top Layer "XT60_POS_L01_P005" (solid, pour order 5): 120.5,132 125.5,132 125.5,104 120.5,104
XT60_Pos on Top Layer "XT60_POS_L01_P004" (solid, pour order 4): 74,134 79,134 79,103 74,103

## Silkscreen, mask and mechanical layers (free items; w line width, h text height)
Top Overlay:
  text "SPARE" at 141.1,130.7 h1.2 r270
  text "POE" at 94.6,129.5 h1.2 r270
  text "SPARE" at 141.1,120.7 h1.2 r270
  text "GNSS" at 94.5,120.3 h1.2 r270
  text "PEPLINK" at 94.4,110.1 h1 r270
  text "SPARE" at 141,109.7 h1.2 r270
  text "SPARE" at 25.9,65.4 h1.2 r270
  text "PRECISE Center" at 168.75,64.75 h1.5 r90
  text "Autonomous Gokart" at 164.7,60.3 h1.7 r90
  text "University of Pennsylvania" at 172.317,57.75 h1.3 r90
  text "PWM-ADC" at 25.8,55.5 h1.2 r270
  text "UPS" at 25.8,42.5 h1.2 r270
  text "ROSCUBE" at 25.9,32.8 h1 r270
Board Shape:
  the board outline again, w0.254
Drill Drawing:
  circle w0.254: c-17.444,233.652 r0.508
  circle w0.254: c-17.444,233.652 r0.847
  circle w0.254: c-17.444,226.032 r0.847
  lines w0.254: -18.291,192.588 -16.597,192.588 -17.444,190.895 -18.291,192.588 ; -18.291,195.552 -17.444,194.705 -16.597,195.552 -17.444,196.398 -18.291,195.552 ; -18.291,198.515 -18.291,198.938 -17.867,199.362 -18.291,199.785 -18.291,200.208 -17.867,200.208 -17.444,199.785 -17.021,200.208 -16.597,200.208 -16.597,199.785 -17.021,199.362 -16.597,198.938 -16.597,198.515 -17.021,198.515 -17.444,198.938 -17.867,198.515 -18.291,198.515 ; -18.291,202.325 -16.597,202.325 -16.597,204.018 -18.291,204.018 -18.291,202.325 ; -18.291,206.135 -16.597,206.135 -16.597,207.828 -18.291,207.828 -18.291,206.135 ; -18.291,210.368 -17.867,210.368 -17.444,209.945 -17.021,210.368 -16.597,210.368 -17.021,210.792 -16.597,211.215 -17.021,211.215 -17.444,211.638 -17.867,211.215 -18.291,211.215 -17.867,210.792 -18.291,210.368 ; -18.291,213.755 -17.444,214.178 -16.597,213.755 -17.021,214.602 -16.597,215.448 -17.444,215.025 -18.291,215.448 -17.867,214.602 -18.291,213.755 ; -18.291,217.565 -17.444,217.988 -16.597,217.565 -17.021,218.412 -16.597,219.258 -17.444,218.835 -18.291,219.258 -17.867,218.412 -18.291,217.565 ; -18.291,221.798 -17.867,221.798 -17.444,221.375 -17.021,221.798 -16.597,221.798 -17.021,222.222 -16.597,222.645 -17.021,222.645 -17.444,223.068 -17.867,222.645 -18.291,222.645 -17.867,222.222 -18.291,221.798 ; -18.291,229.418 -17.867,229.418 -17.867,228.995 -17.021,228.995 -17.021,229.418 -16.597,229.418 -16.597,230.265 -17.021,230.265 -17.021,230.688 -17.867,230.688 -17.867,230.265 -18.291,230.265 -18.291,229.418 ; -18.291,238.308 -16.597,238.308 -17.444,236.615 -18.291,238.308 ; -17.952,206.474 -16.936,206.474 -16.936,207.49 -17.952,207.49 -17.952,206.474 ; -17.952,210.538 -17.698,210.538 -17.444,210.284 -17.19,210.538 -16.936,210.538 -17.19,210.792 -16.936,211.046 -17.19,211.046 -17.444,211.3 -17.698,211.046 -17.952,211.046 -17.698,210.792 -17.952,210.538 ; -17.952,217.904 -17.444,218.158 -16.936,217.904 -17.19,218.412 -16.936,218.92 -17.444,218.666 -17.952,218.92 -17.698,218.412 -17.952,217.904 ; -17.952,237.97 -16.936,237.97 -17.444,236.954 -17.952,237.97
  lines w0.381: -19.81,189.752 272.818,189.752 ; -19.81,239.282 272.818,239.282 ; -5.817,185.942 -5.817,243.092 ; 9.165,185.942 9.165,243.092 ; 38.366,185.942 38.366,243.092 ; 51.215,185.942 51.215,243.092 ; 69.854,185.942 69.854,243.092 ; 107.943,185.942 107.943,243.092 ; 122.925,185.942 122.925,243.092 ; 141.868,185.942 141.868,243.092 ; 182.242,185.942 182.242,243.092 ; 203.928,185.942 203.928,243.092 ; 237.801,185.942 237.801,243.092 ; -19.81,185.942 272.818,185.942 272.818,243.092 -19.81,243.092 -19.81,185.942
  text "Symbol" at -17.524,240.425 h1.83
  text "Count" at -4.674,240.425 h1.83
  text "Hole Size" at 10.308,240.425 h1.83
  text "Plated" at 39.509,240.425 h1.83
  text "Hole Type" at 52.358,240.425 h1.83
  text "Drill Layer Pair" at 70.997,240.425 h1.83
  text "Via/Pad" at 109.086,240.425 h1.83
  text "Pad Shape" at 124.068,240.425 h1.83
  text "Template" at 143.011,240.425 h1.83
  text "Description" at 183.385,240.425 h1.83
  text "Hole Tolerance (+)" at 205.071,240.425 h1.83
  text "Hole Tolerance (-)" at 238.944,240.425 h1.83
  text "2" at -4.674,236.615 h1.52
  text "0.600mm (23.62mil)" at 10.308,236.615 h1.52
  text "PTH" at 39.509,236.615 h1.52
  text "Slot" at 52.358,236.615 h1.52
  text "Top Layer - Bottom Layer" at 70.997,236.615 h1.52
  text "Pad" at 109.086,236.615 h1.52
  text "Rounded" at 124.068,236.615 h1.52
  text "r260_130h60_160r100" at 143.011,236.615 h1.52
  text "2" at -4.674,232.805 h1.52
  text "3.900mm (153.54mil)" at 10.308,232.805 h1.52
  text "PTH" at 39.509,232.805 h1.52
  text "Round" at 52.358,232.805 h1.52
  text "Top Layer - Bottom Layer" at 70.997,232.805 h1.52
  text "Pad" at 109.086,232.805 h1.52
  text "(Mixed)" at 124.068,232.805 h1.52
  text "(Mixed)" at 143.011,232.805 h1.52
  text "4" at -4.674,228.995 h1.52
  text "0.800mm (31.50mil)" at 10.308,228.995 h1.52
  text "PTH" at 39.509,228.995 h1.52
  text "Round" at 52.358,228.995 h1.52
  text "Top Layer - Bottom Layer" at 70.997,228.995 h1.52
  text "Pad" at 109.086,228.995 h1.52
  text "Rounded" at 124.068,228.995 h1.52
  text "c115h80" at 143.011,228.995 h1.52
  text "4" at -4.674,225.185 h1.52
  text "0.840mm (33.07mil)" at 10.308,225.185 h1.52
  text "PTH" at 39.509,225.185 h1.52
  text "Round" at 52.358,225.185 h1.52
  text "Top Layer - Bottom Layer" at 70.997,225.185 h1.52
  text "Pad" at 109.086,225.185 h1.52
  text "Rounded" at 124.068,225.185 h1.52
  text "c119h84" at 143.011,225.185 h1.52
  text "4" at -4.674,221.375 h1.52
  text "0.850mm (33.47mil)" at 10.308,221.375 h1.52
  text "PTH" at 39.509,221.375 h1.52
  text "Round" at 52.358,221.375 h1.52
  text "Top Layer - Bottom Layer" at 70.997,221.375 h1.52
  text "Pad" at 109.086,221.375 h1.52
  text "Rounded" at 124.068,221.375 h1.52
  text "(Mixed)" at 143.011,221.375 h1.52
  text "4" at -4.674,217.565 h1.52
  text "4.000mm (157.48mil)" at 10.308,217.565 h1.52
  text "PTH" at 39.509,217.565 h1.52
  text "Round" at 52.358,217.565 h1.52
  text "Top Layer - Bottom Layer" at 70.997,217.565 h1.52
  text "Pad" at 109.086,217.565 h1.52
  text "Rounded" at 124.068,217.565 h1.52
  text "c762h400" at 143.011,217.565 h1.52
  text "8" at -4.674,213.755 h1.52
  text "0.864mm (34.00mil)" at 10.308,213.755 h1.52
  text "PTH" at 39.509,213.755 h1.52
  text "Round" at 52.358,213.755 h1.52
  text "Top Layer - Bottom Layer" at 70.997,213.755 h1.52
  text "Pad" at 109.086,213.755 h1.52
  text "(Mixed)" at 124.068,213.755 h1.52
  text "(Mixed)" at 143.011,213.755 h1.52
  text "8" at -4.674,209.945 h1.52
  text "1.500mm (59.06mil)" at 10.308,209.945 h1.52
  text "PTH" at 39.509,209.945 h1.52
  text "Round" at 52.358,209.945 h1.52
  text "Top Layer - Bottom Layer" at 70.997,209.945 h1.52
  text "Pad" at 109.086,209.945 h1.52
  text "(Mixed)" at 124.068,209.945 h1.52
  text "(Mixed)" at 143.011,209.945 h1.52
  text "12" at -4.674,206.135 h1.52
  text "0.750mm (29.53mil)" at 10.308,206.135 h1.52
  text "PTH" at 39.509,206.135 h1.52
  text "Round" at 52.358,206.135 h1.52
  text "Top Layer - Bottom Layer" at 70.997,206.135 h1.52
  text "Pad" at 109.086,206.135 h1.52
  text "(Mixed)" at 124.068,206.135 h1.52
  text "(Mixed)" at 143.011,206.135 h1.52
  text "12" at -4.674,202.325 h1.52
  text "1.300mm (51.18mil)" at 10.308,202.325 h1.52
  text "PTH" at 39.509,202.325 h1.52
  text "Round" at 52.358,202.325 h1.52
  text "Top Layer - Bottom Layer" at 70.997,202.325 h1.52
  text "Pad" at 109.086,202.325 h1.52
  text "(Mixed)" at 124.068,202.325 h1.52
  text "(Mixed)" at 143.011,202.325 h1.52
  text "16" at -4.674,198.515 h1.52
  text "0.700mm (27.56mil)" at 10.308,198.515 h1.52
  text "PTH" at 39.509,198.515 h1.52
  text "Round" at 52.358,198.515 h1.52
  text "Top Layer - Bottom Layer" at 70.997,198.515 h1.52
  text "Pad" at 109.086,198.515 h1.52
  text "(Mixed)" at 124.068,198.515 h1.52
  text "(Mixed)" at 143.011,198.515 h1.52
  text "44" at -4.674,194.705 h1.52
  text "4.500mm (177.17mil)" at 10.308,194.705 h1.52
  text "PTH" at 39.509,194.705 h1.52
  text "Round" at 52.358,194.705 h1.52
  text "Top Layer - Bottom Layer" at 70.997,194.705 h1.52
  text "Pad" at 109.086,194.705 h1.52
  text "(Mixed)" at 124.068,194.705 h1.52
  text "(Mixed)" at 143.011,194.705 h1.52
  text "72" at -4.674,190.895 h1.52
  text "1.200mm (47.24mil)" at 10.308,190.895 h1.52
  text "PTH" at 39.509,190.895 h1.52
  text "Slot" at 52.358,190.895 h1.52
  text "Top Layer - Bottom Layer" at 70.997,190.895 h1.52
  text "Pad" at 109.086,190.895 h1.52
  text "Rounded" at 124.068,190.895 h1.52
  text "r300_245h120_180r100p-1_-1" at 143.011,190.895 h1.52
  text "192 Total" at -4.674,187.085 h1.52
  text "Slot definitions :" at -17.524,183.403 h1.52
  text "Routed Path Length" at 8.707,183.403 h1.52
  text "= Calculated from tool start centre position to tool end centre position." at 36.715,183.403 h1.52
  text "Hole Length" at 8.707,180.863 h1.52
  text "= Routed Path Length + Tool Size = Slot length as defined in the PCB layout" at 26.304,180.863 h1.52

## Dimensions
0,0 to 180,0 on Mechanical 1
0,140 to 0,0 on Mechanical 1

## Text inside footprints (layer, text, board x,y; h text height)
XF1_Oust: Top Overlay "24VDC @ 1A" at 56.169,54.998 h2.54 r270; Top Overlay "f" at 56,58.5 h2.29 r270
XF1_Velo: Top Overlay "24VDC @ 1A" at 55.669,84.498 h2.54 r270; Top Overlay "f" at 55.5,88 h2.29 r270
XF2: Top Overlay "f" at 126,92.5 h2.29 r270; Top Overlay "12VDC @ 2A" at 126.169,86.998 h2.54 r270
XF3: Top Overlay "f" at 37.5,113.5 h2.29; Top Overlay "24VDC @ 5A" at 37.502,115.669 h2.54
XF5: Top Overlay "24VDC @ 0.5A" at 82.502,132.669 h2.54; Top Overlay "f" at 79,132.5 h2.29
XF6: Top Overlay "f" at 79,122 h2.29; Top Overlay "24VDC @ 0.5A" at 82.502,122.169 h2.54
XF7: Top Overlay "f" at 79,111.5 h2.29; Top Overlay "24VDC @ 1A" at 82.502,111.669 h2.54
XF8: Top Overlay "24VDC @ 0.5A" at 129.502,132.669 h2.54; Top Overlay "f" at 126,132.5 h2.29
XF9: Top Overlay "12VDC @ 2A" at 126.169,54.998 h2.54 r270; Top Overlay "f" at 126,60.5 h2.29 r270
XF10: Top Overlay "f" at 126,122 h2.29; Top Overlay "24VDC @ 0.5A" at 129.467,122.269 h2.54
XF11: Top Overlay "f" at 126,111.5 h2.29; Top Overlay "24VDC @ 2A" at 129.502,111.669 h2.54
XF12: Top Overlay "24VDC @ 10A" at 10.002,103.669 h2.54; Top Overlay "f" at 25,105 h2.29 r180
XF13: Top Overlay "12VDC @ 0.5A" at 15.802,67.069 h2.54; Top Overlay "f" at 12.1,67 h2.29
XF14: Top Overlay "12VDC @ 0.5A" at 15.302,56.369 h2.54; Top Overlay "f" at 11.9,56.5 h2.29
XF15: Top Overlay "f" at 30,20.5 h2.29 r270; Top Overlay "24VDC @ 1A" at 30.169,16.498 h2.54 r270
XF16: Top Overlay "12VDC @ 5A" at 15.967,45.169 h2.54; Top Overlay "f" at 11.965,45 h2.29
XF17: Top Overlay "12VDC @ 12A" at 15.902,34.669 h2.54; Top Overlay "f" at 11.9,34.5 h2.29
XF18: Top Overlay "24VDC @ 1A" at 99.669,17.998 h2.54 r270; Top Overlay "f" at 99.5,21.5 h2.29 r270